# Altium PCB Front Distribution Board.PcbDoc
Units mm, origin at the board's own origin, x right, y up, seen from the top; angles counter-clockwise.
Board outline 44 x 56 mm, 2 copper layers (Top Layer, Bottom Layer), stack 1.621 mm thick; 31 components, 7 nets, 85 pads, 37 vias.
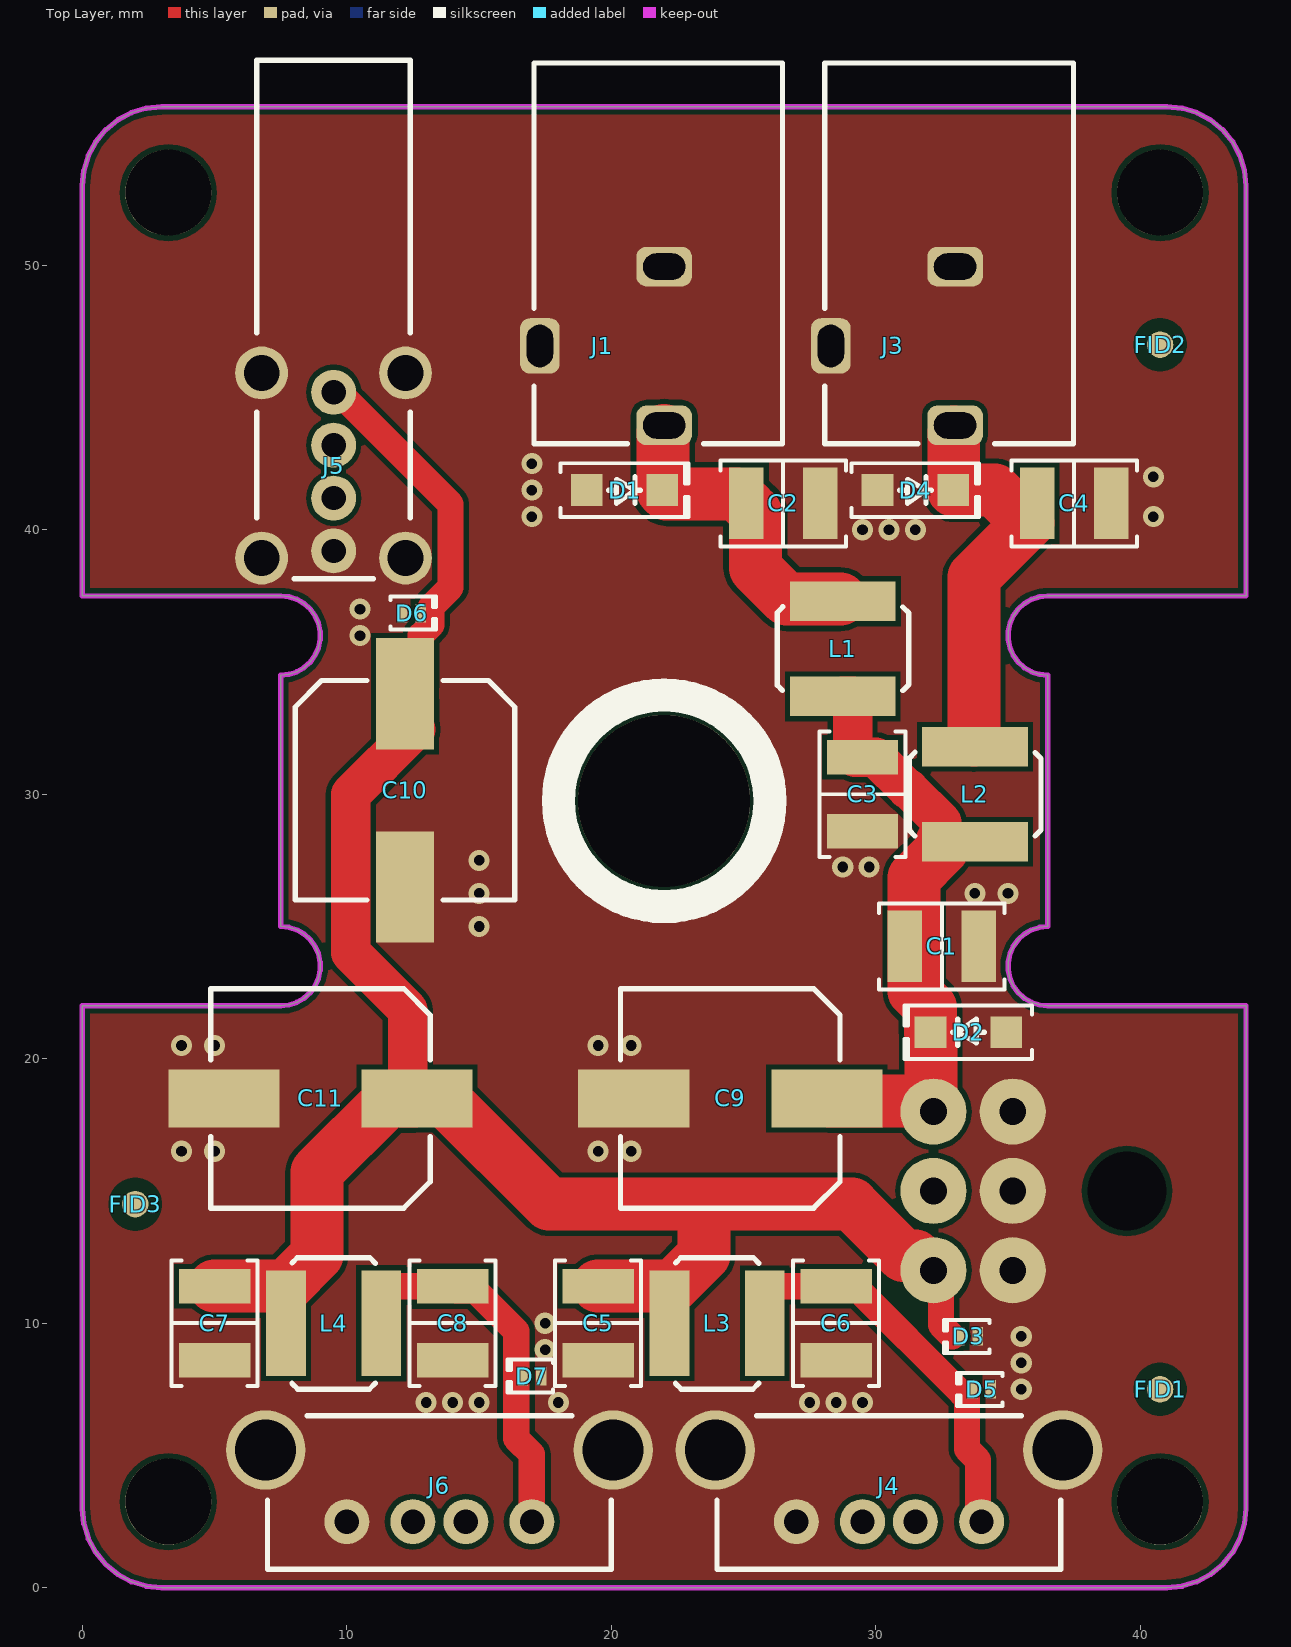
[diagram p0: Top Layer view]
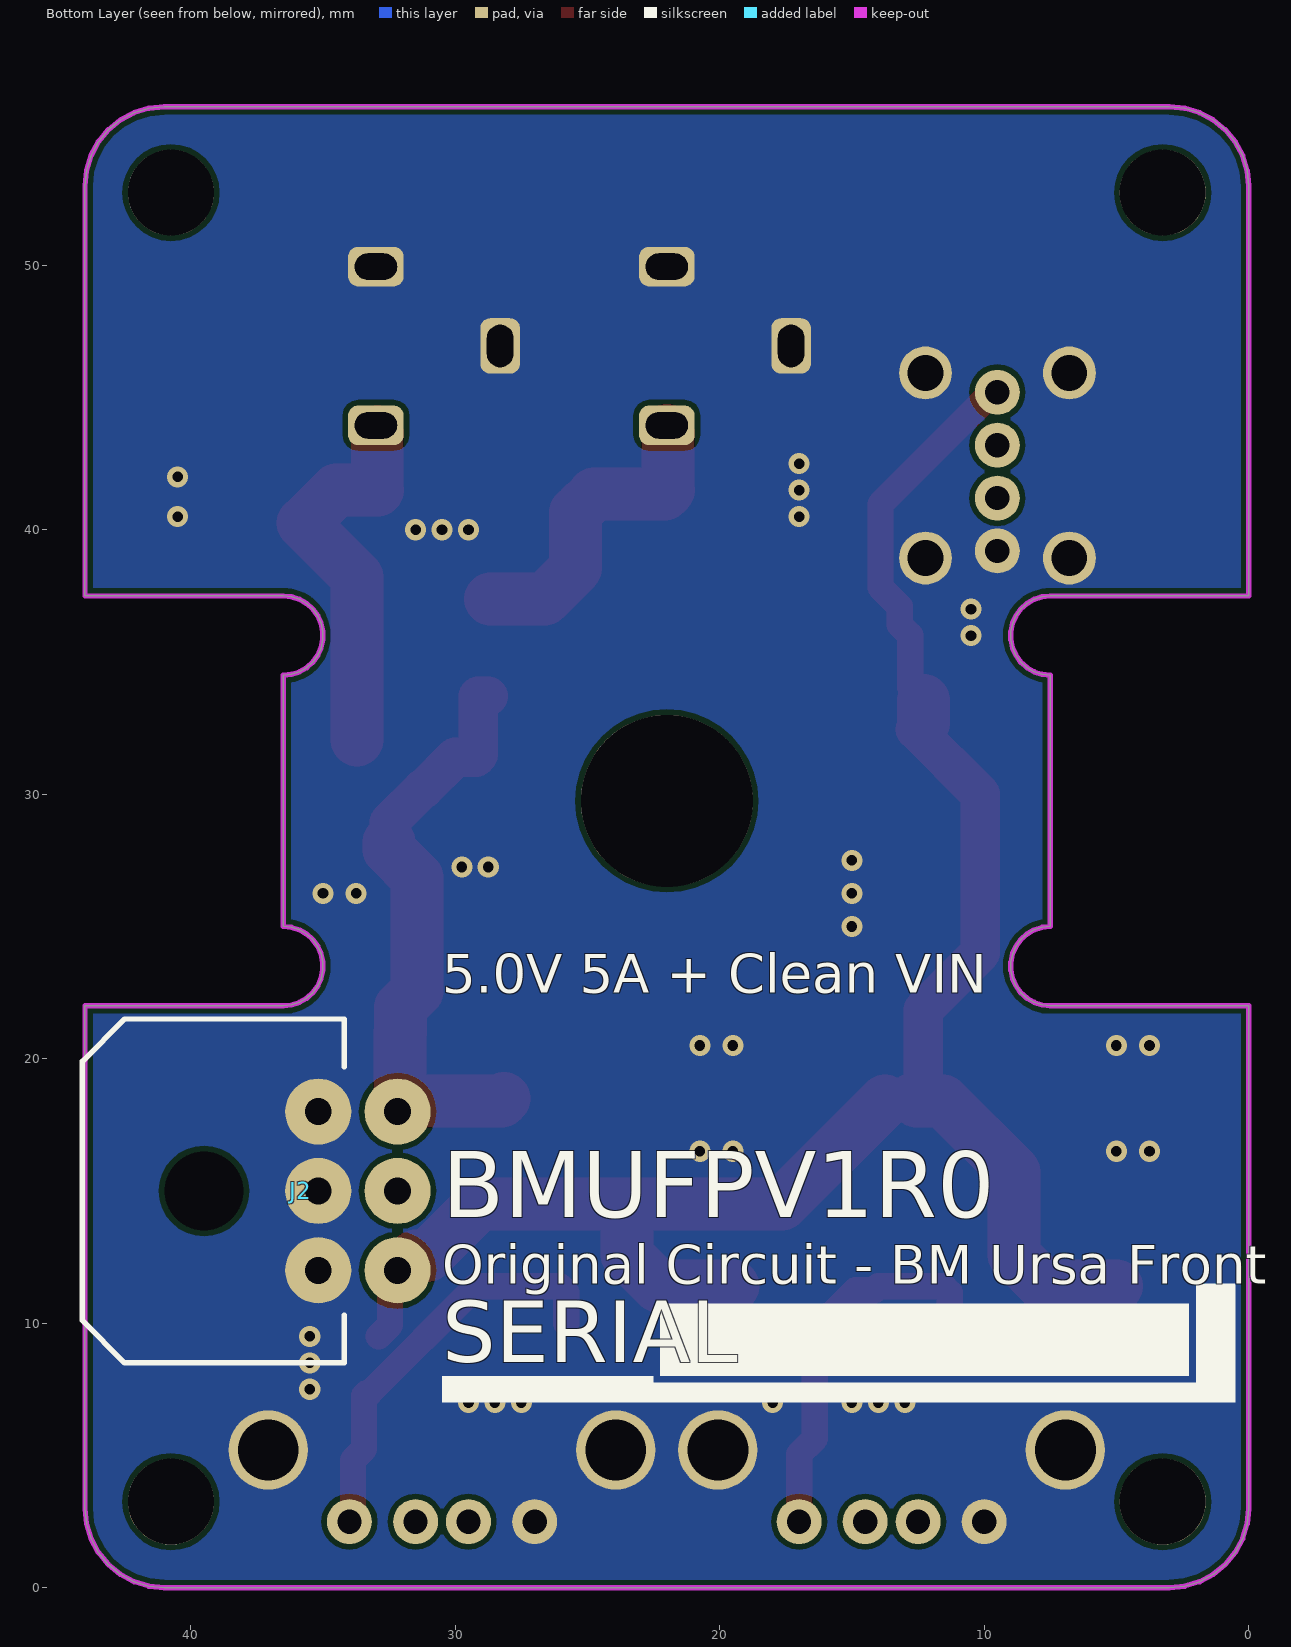
[diagram p1: Bottom Layer view, seen from below]
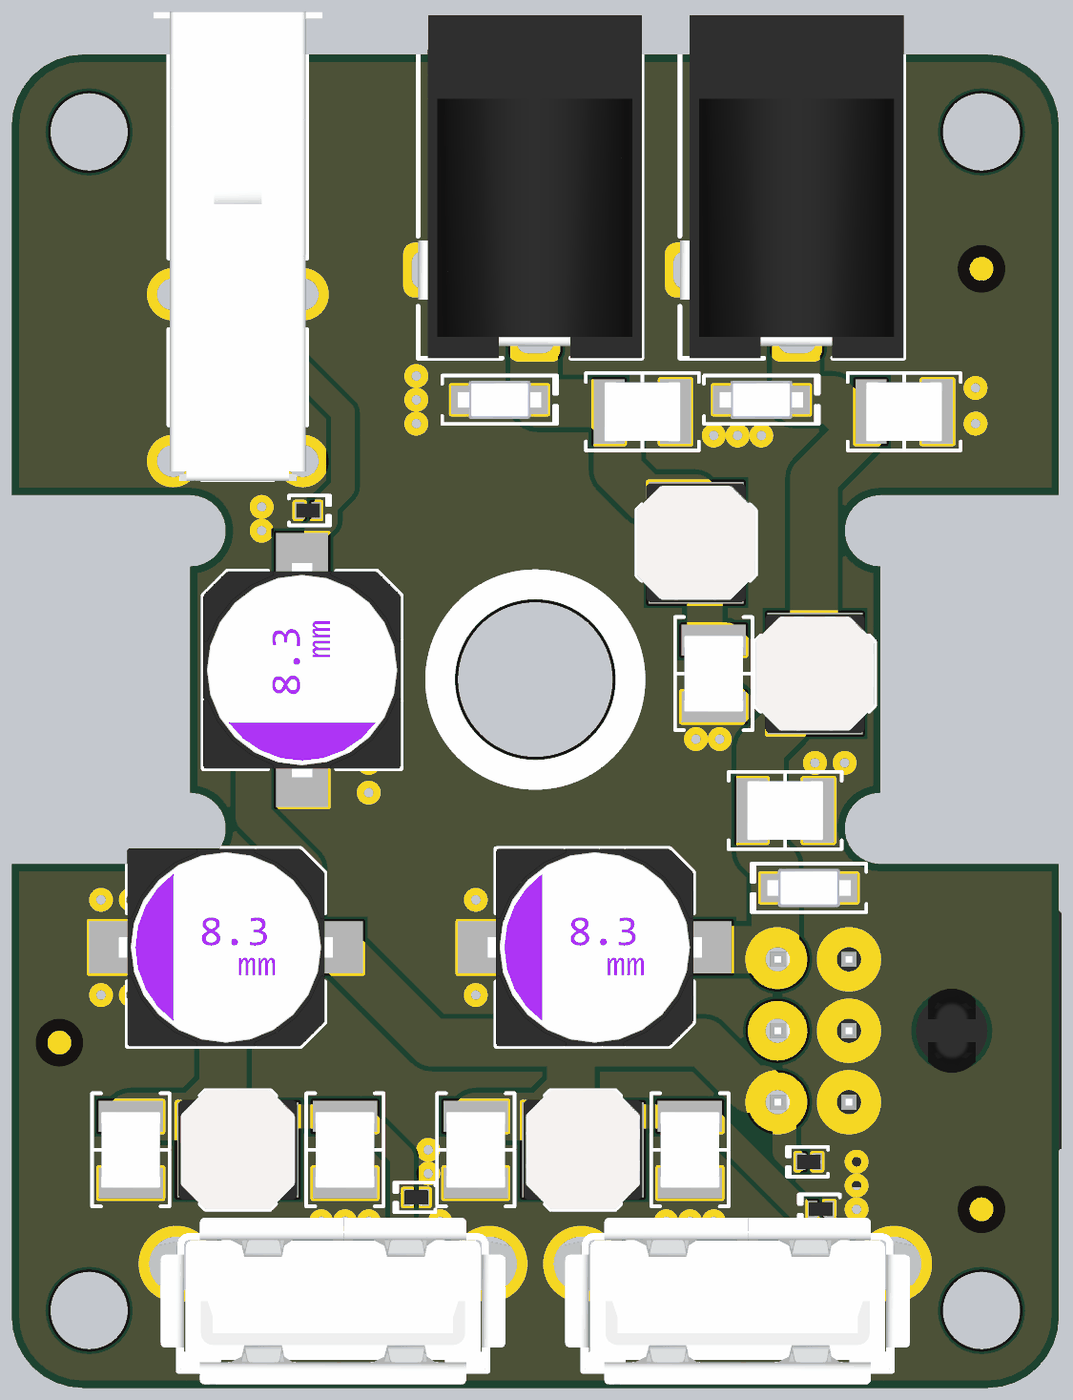
[diagram p2: 3D render of the assembled board from above, using the file's embedded part models]

## Layer stack, top to bottom
Top Solder: solder mask 0.0102, Solder Resist, Dk 3.5
Top Layer: signal copper 0.0356
Dielectric1: core 1.55, FR-4, Dk 4.8
Bottom Layer: signal copper 0.0356
Bottom Solder: solder mask 0.0102, Solder Resist, Dk 3.5

## Board outline
0.879,0.879 1.333,0.506 1.852,0.228 2.415,0.058 3,0 41,0 41.585,0.058 42.148,0.228 42.667,0.506 43.121,0.879 43.494,1.333 43.772,1.852 43.942,2.415 44,3 44,22 36.5,22 36.188,22.033 35.89,22.13 35.618,22.286 35.385,22.496 35.201,22.75 35.073,23.036 35.008,23.343 35.008,23.657 35.073,23.964 35.201,24.25 35.385,24.504 35.618,24.714 35.89,24.87 36.188,24.967 36.5,25 36.5,34.5 36.188,34.533 35.89,34.63 35.618,34.786 35.385,34.996 35.201,35.25 35.073,35.536 35.008,35.843 35.008,36.157 35.073,36.464 35.201,36.75 35.385,37.004 35.618,37.214 35.89,37.37 36.188,37.467 36.5,37.5 44,37.5 44,53 43.942,53.585 43.772,54.148 43.494,54.667 43.121,55.121 42.667,55.494 42.148,55.772 41.585,55.942 41,56 3,56 2.415,55.942 1.852,55.772 1.333,55.494 0.879,55.121 0.506,54.667 0.228,54.148 0.058,53.585 0,53 0,37.5 7.5,37.5 7.812,37.467 8.11,37.37 8.382,37.214 8.615,37.004 8.799,36.75 8.927,36.464 8.992,36.157 8.992,35.843 8.927,35.536 8.799,35.25 8.615,34.996 8.382,34.786 8.11,34.63 7.812,34.533 7.5,34.5 7.5,25 7.812,24.967 8.11,24.87 8.382,24.714 8.615,24.504 8.799,24.25 8.927,23.964 8.992,23.657 8.992,23.343 8.927,23.036 8.799,22.75 8.615,22.496 8.382,22.286 8.11,22.13 7.812,22.033 7.5,22 0,22 0,3 0.058,2.415 0.228,1.852 0.506,1.333

## Design rules (kind name [scope] priority, off if disabled: settings)
Clearance PadClearance [IsPad vs IsPad] p1: gap=0.2 ignorepadtopadclearanceinfootprint=FALSE except(0: Arc-Hole Track-Hole SMDPad-Hole THPad-Hole Via-Hole Fill-Hole Poly-Hole Region-Hole Text-Hole)
Clearance [All] p2: gap=0.2 ignorepadtopadclearanceinfootprint=FALSE except(0: Arc-Hole Track-Hole SMDPad-Hole THPad-Hole Via-Hole Fill-Hole Poly-Hole Region-Hole Text-Hole)
HoleSize [All] p1: absolutevalues=TRUE maxlimit=6.5 minlimit=0.4 maxpercent=80.000 minpercent=20.000
HoleToHoleClearance [All] p1: gap=0.2 allowstackedmicrovias=TRUE
MinimumSolderMaskSliver [All] p1: minsoldermaskwidth=0
PolygonConnect ViaConnect [IsVia] p1: connectstyle=Direct reliefconductorwidth=0.254 reliefentries=4 polygonreliefangle="90 Angle" airgapwidth=0.254
PolygonConnect [All] p2: connectstyle=Direct reliefconductorwidth=0.3 reliefentries=4 polygonreliefangle="90 Angle" airgapwidth=0.254
RoutingVias [All] p1: holewidth=0.6 width=1 viastyle="Through Hole" minholewidth=0.4 minwidth=0.8 maxholewidth=5 maxwidth=6
SilkToSilkClearance [All] p1: silktosilkclearance=0
SilkToSolderMaskClearance SilkscreenOverComponentPads [IsPad] p1: minsilkscreentomaskgap=0.05 clearancetoexposedcopper=TRUE
SolderMaskExpansion "Via Tenting" [IsVia] p1: expansion=-2 istentingtop=FALSE
SolderMaskExpansion [All] p2: expansion=0.102 istentingtop=FALSE
Width [All] p1: maxlimit=2 minlimit=0.2 preferedwidth=0.4
25 further rules are at their usual default settings.

## Components (designator, comment, footprint, x,y, rotation, side; value= is the part's Value field where it differs from the comment)
C1 "22µF" "CAP 1210_3225 - 2.8MM" 32.5,24.25 r180 top
C2 "22µF" "CAP 1210_3225 - 2.8MM" 26.5,41 r180 top
C3 "22µF" "CAP 1210_3225 - 2.8MM" 29.5,30 r90 top
C4 "22µF" "CAP 1210_3225 - 2.8MM" 37.5,41 r180 top
C5 "22µF" "CAP 1210_3225 - 2.8MM" 19.5,10 r90 top
C6 "22µF" "CAP 1210_3225 - 2.8MM" 28.5,10 r90 top
C7 "22µF" "CAP 1210_3225 - 2.8MM" 5,10 r90 top
C8 "22µF" "CAP 1210_3225 - 2.8MM" 14,10 r90 top
C9 "180µF" "CAP ALSMD POLY 8.3MM H7.0MM" 24.5,18.5 r180 top
C10 "820µF" "CAP ALSMD POLY 8.3MM H10.0MM" 12.2,30.15 r270 top
C11 "820µF" "CAP ALSMD POLY 8.3MM H10.0MM" 9,18.5 r180 top
D1 "SMF18A-TP" SOD123F 20.5,41.5 r0 top
D2 "SMF18A-TP" SOD123F 33.5,21 r180 top
D3 "TPD1E10B06QDPYRQ1" 0402 33.5,9.5 r180 top
D4 "SMF18A-TP" SOD123F 31.5,41.5 r0 top
D5 "TPD1E10B06QDPYRQ1" 0402 34,7.5 r180 top
D6 "TPD1E10B06QDPYRQ1" 0402 12.45,36.85 r0 top
D7 "TPD1E10B06QDPYRQ1" 0402 17,8 r180 top
FID1 "Fiducial" Fiducial-1mm 40.75,7.5 r90 top
FID2 "Fiducial" Fiducial-1mm 40.75,47 r90 top
FID3 "Fiducial" Fiducial-1mm 2,14.5 r90 top
J1 "PJ-102AH" "CUI PJ-102AH" 22,50.45 r0 top
J2 "0430450600" "MOLEX MICRO-FIT 3.0 0430450600" 39.5,15 r270 bottom
J3 "PJ-102AH" "CUI PJ-102AH" 33,50.45 r0 top
J4 "1002-021-01000" "CNC TECH 1002-021-01000" 30.5,4 r180 top
J5 "73725-0110BLF" "AMPHENOL USB 73725-0110BLF" 9.5,47.95 r180 top
J6 "1002-021-01000" "CNC TECH 1002-021-01000" 13.5,4 r180 top
L1 "4.7µH" "TAIYO YUDEN NRS5030" 28.75,35.5 r90 top
L2 "4.7µH" "TAIYO YUDEN NRS5030" 33.75,30 r90 top
L3 "4.7µH" "TAIYO YUDEN NRS5030" 24,10 r0 top
L4 "4.7µH" "TAIYO YUDEN NRS5030" 9.5,10 r0 top

## Footprints (in the part's own frame and the unit in brackets; to place one, negate y for a bottom-side part, rotate by r counter-clockwise, add the part's x,y. Pads: shape width x height; smd on the part's side, far side on the other; paste and mask are expansions set on the pad)
0402 [mm] "SODFL, 2-Leads, Body 0.675x1.075mm, IPC Medium Density"
  rect 0.4x0.7 smd: 1(-0.35,0) 2(0.35,0)
  silkscreen extent -0.8,-0.63 0.92,0.63, body extent -0.51,-0.31 0.5,0.3, height 0.45
"AMPHENOL USB 73725-0110BLF" [mm] "USB2.0 TYPEA 4 Pin Pitch 2mm"
  round 1.7 hole 0.92: 1(0,2.75) 2(0,4.75) 3(0,6.75) 4(0,8.75)
  round 2 hole 1.35: S(-2.72,9.02) S(-2.72,2.02) S(2.72,9.02) S(2.72,2.02)
  silkscreen extent -2.9,-9.8 2.9,9.8, body extent -3.56,-9.85 3.56,9.85, height 14.53
"CAP 1210_3225 - 2.8MM" [mm] "Chip Capacitor, 2-Leads, Body 3.20x2.50mm, IPC Medium Density"
  rect 1.3x2.7 smd: 1(-1.4,0) 2(1.4,0)
  silkscreen extent -2.37,-1.63 2.37,1.63, body extent -1.6,-1.25 1.6,1.25, height 2.8
"CAP ALSMD POLY 8.3MM H7.0MM" [mm] "Aluminum Electrolytic Capacitor, Body 8.30x8.30x7mm"
  rect 4.2x2.2 smd: 1(-3.65,0) 2(3.65,0)
  silkscreen extent -4.15,-4.15 4.15,4.15, body extent -4.5,-4.15 4.5,4.15, height 7
"CAP ALSMD POLY 8.3MM H10.0MM" [mm] "Aluminum Electrolytic Capacitor, Body 8.30x8.30x10.0mm"
  rect 4.2x2.2 smd: 1(-3.65,0) 2(3.65,0)
  silkscreen extent -4.15,-4.15 4.15,4.15, body extent -4.5,-4.15 4.5,4.15, height 10
"CNC TECH 1002-021-01000" [mm] "USB2.0 TYPEA 4 Pin Pitch 2-2.5mm"
  round 1.7 hole 0.92: 1(-3.5,1.505) 2(-1,1.505) 3(1,1.505) 4(3.5,1.505)
  round 3 hole 2.3: S(-6.57,-1.205) S(6.57,-1.205)
  silkscreen extent -6.5,-2.5 6.5,3.3, body extent -7.89,-3.14 7.89,3.86, height 15
"CUI PJ-102AH" [mm] "DC Barrel Jack W/ Switch 2.0x5.5"
  rrect50% 2.1x1.5 hole 1 slot 1.6 at 0 deg: 1(0,-6.5) 2(0,-0.5)
  rrect50% 1.5x2.1 hole 1 slot 1.6 at 90 deg: 3(-4.7,-3.5)
  silkscreen extent -4.92,-7.2 4.47,7.2, body extent -4.92,-7.2 4.47,7.2, height 11
Fiducial-1mm [mm]
  round 1 smd paste-1 mask+0.5: F(0,0)
  Top Layer pour cut-out: 0,0
  Top Layer pour cut-out: -1,0 -0.924,0.383 -0.707,0.707 -0.383,0.924 0,1 0,1 0.383,0.924 0.707,0.707 0.924,0.383 1,0 1,0 0.924,-0.383 0.707,-0.707 0.383,-0.924 0,-1 0,-1 -0.383,-0.924 -0.707,-0.707 -0.924,-0.383 -1,0
"MOLEX MICRO-FIT 3.0 0430450600" [mm]
  round 2.5 hole 1.02 unplated paste-5: 1(3,4.32) 2(0,4.32) 3(-3,4.32) 4(3,7.32) 5(0,7.32) 6(-3,7.32)
  oval 0.1x1 hole 3 unplated: M(0,0)
  silkscreen extent -6.5,-4.6 6.5,5.3, body extent -6.57,-4.6 6.58,7.64, height 8.77
SOD123F [mm] "SODFL, 2-Leads, Body 1.60x3.50mm, IPC Medium Density"
  rect 1.2x1.2 smd: 1(-1.43,0) 2(1.43,0)
  silkscreen extent -2.41,-1.02 2.41,1.02, body extent -1.75,-0.8 1.75,0.8, height 1.1
"TAIYO YUDEN NRS5030" [mm] "Inductor, 2-Leads,Taiyo Yuden, NRS5030T4R7MMGJV"
  rect 1.5x4 smd: 1(-1.8,0) 2(1.8,0)
  silkscreen extent -1.57,-2.5 1.59,2.47, body extent -2.5,-2.5 2.5,2.5, height 3

## Part data
C1 C2 C3 C4 C5 C6 C7 C8: library part CL32A226KAJNNNE, "CAP CER 22UF 25V X5R 1210", Device Package="1210 (3225 Metric)", Manufacturer="Samsung Electro-Mechanics", Operating Temperature="-55°C ~ 85°C", Supplier Part Number 1=1276-1101-1-ND, Temperature Coefficient=X5R, Tolerance=±10%, Voltage - Rated=25V, Applications="General Purpose", Capacitance=22µF, ComponentLink1Description=Datasheet, ComponentLink1URL=http://www.samsungsem.com/kr/support/product-search/mlcc/CL32A226KAJNNNE.jsp, ComponentLink2Description="DigiKey Link", ComponentLink2URL=http://digikey.com/product-detail/en/samsung-electro-mechanics/CL32A226KAJNNNE/1276-1101-1-ND/3889187, LastUpdated="21/01/2020 00:30:21", Lifecycle Status=Active, Minimum Order=1, Mounting Type="Surface Mount, MLCC", Package / Case="1210 (3225 Metric)", Packaging=TapeAndReel, Part Number=CL32A226KAJNNNE, Part Status=Active, PartId=24102, Price=0.13, Series=CL, Size / Dimension="0.126\" L x 0.098\" W (3.20mm x 2.50mm)", Supplier 1=DigiKey, Thickness (Max)="0.106\" (2.70mm)"
C9: library part APXG200ARA181MH70G, "CAP ALUM POLY 180UF 20% 20V SMD", Device Package="Radial, Can - SMD", ESR (Equivalent Series Resistance)=25mOhm, Lifetime @ Temp.="15000 Hrs @ 105°C", Manufacturer="United Chemi-Con", Operating Temperature="-55°C ~ 105°C", Ripple Current @ High Frequency="3.2A @ 100kHz", Supplier Part Number 1=565-4296-1-ND, Tolerance=±20%, Voltage - Rated=20V, Applications="General Purpose", Capacitance=180µF, ComponentLink1Description=Datasheet, ComponentLink1URL=http://www.chemi-con.co.jp/cgi-bin/CAT_DB/SEARCH/cat_db_al.cgi?e=e&j=p&pdfname=pxg, ComponentLink2Description="DigiKey Link", ComponentLink2URL=http://digikey.com/product-detail/en/united-chemi-con/APXG200ARA181MH70G/565-4296-1-ND/5824817, Height - Seated (Max)="0.276\" (7.00mm)", LastUpdated="21/01/2020 04:07:43", Lifecycle Status=Active, Minimum Order=1, Mounting Type="Surface Mount", Package / Case="Radial, Can - SMD", Packaging=TapeAndReel, Part Number=APXG200ARA181MH70G, Part Status=Active, PartId=2499, Price=0.37, Series=NPCAP™-PXG, Size / Dimension="0.315\" Dia (8.00mm)", Supplier 1=DigiKey, Surface Mount Land Size="0.327\" L x 0.327\" W (8.30mm x 8.30mm)", Type=Polymer
C10 C11: library part A765KN827M0JLAE010, "CAP ALUM POLY 820UF 20% 6.3V SMD", Device Package="Radial, Can - SMD", ESR (Equivalent Series Resistance)=10mOhm, Lifetime @ Temp.="2000 Hrs @ 105°C", Manufacturer=KEMET, Operating Temperature="-55°C ~ 105°C", Ripple Current @ High Frequency="3.35A @ 100kHz", Ripple Current @ Low Frequency="167.5mA @ 120Hz", Supplier Part Number 1=399-13684-1-ND, Tolerance=±20%, Voltage - Rated=6.3V, Applications="General Purpose", Capacitance=820µF, ComponentLink1Description=Datasheet, ComponentLink1URL=https://api.kemet.com/component-edge/download/datasheet/A765KN827M0JLAE010.pdf, ComponentLink2Description="DigiKey Link", ComponentLink2URL=http://digikey.com/product-detail/en/kemet/A765KN827M0JLAE010/399-13684-1-ND/6196370, Height - Seated (Max)="0.394\" (10.00mm)", LastUpdated="21/01/2020 04:08:13", Lifecycle Status=Active, Minimum Order=1, Mounting Type="Surface Mount", Package / Case="Radial, Can - SMD", Packaging=TapeAndReel, Part Number=A765KN827M0JLAE010, Part Status=Active, PartId=2604, Price=0.33, Series=A765, Size / Dimension="0.315\" Dia (8.00mm)", Supplier 1=DigiKey, Surface Mount Land Size="0.327\" L x 0.327\" W (8.30mm x 8.30mm)", Type=Polymer
D1 D2 D4: "TVS DIODE 18V 29.2V SOD123FL", Current - Peak Pulse (10/1000µs)=6.8A, Device Package=SOD-123F, Manufacturer="Micro Commercial Co", Operating Temperature="-65°C ~ 175°C (TA)", Power - Peak Pulse=200W, Power Line Protection=No, Supplier Device Package=SOD-123FL, Supplier Part Number 1=SMF18A-TPMSCT-ND, Voltage - Breakdown (Min)=20V, Voltage - Clamping (Max) @ Ipp=29.2V, Voltage - Reverse Standoff (Typ)=18V, Applications="General Purpose", ComponentLink1Description=Datasheet, ComponentLink1URL=https://www.mccsemi.com/pdf/Products/SMF5.0-170(SOD-123FL)-V2.pdf, ComponentLink2Description="DigiKey Link", ComponentLink2URL=http://digikey.com/product-detail/en/micro-commercial-co/SMF18A-TP/SMF18A-TPMSCT-ND/5114017, LastUpdated="21/03/2020 01:50:28", Lifecycle Status=Active, Minimum Order=1, Mounting Type="Surface Mount", Package / Case=SOD-123F, Packaging=TapeAndReel, Part Number=SMF18A-TP, Part Status=Active, PartId=10171, Price=0.09, Series=-, Supplier 1=DigiKey, Type=Zener, Unidirectional Channels=1
D3 D5 D6 D7: "TVS DIODE 5.5V 14V 2X1SON", Capacitance @ Frequency="12pF @ 1MHz", Current - Peak Pulse (10/1000µs)="6A (8/20µs)", Device Package="0402 (1006 Metric)", Manufacturer="Texas Instruments", Operating Temperature="-40°C ~ 125°C (TA)", Power - Peak Pulse=90W, Power Line Protection=No, Supplier Device Package="2-X1SON (1x.60)", Supplier Part Number 1=296-TPD1E10B06QDPYRQ1CT-ND, Voltage - Breakdown (Min)=6V, Voltage - Clamping (Max) @ Ipp="14V (Typ)", Voltage - Reverse Standoff (Typ)="5.5V (Max)", Applications=Automotive, Bidirectional Channels=1, ComponentLink1Description=Datasheet, ComponentLink1URL=http://www.ti.com/general/docs/suppproductinfo.tsp?distId=10&gotoUrl=http%3A%2F%2Fwww.ti.com%2Flit%2Fgpn%2Ftpd1e10b06-q1, ComponentLink2Description="DigiKey Link", ComponentLink2URL=http://digikey.com/product-detail/en/texas-instruments/TPD1E10B06QDPYRQ1/296-TPD1E10B06QDPYRQ1CT-ND/6609868, LastUpdated="21/03/2020 02:05:15", Lifecycle Status=Active, Minimum Order=1, Mounting Type="Surface Mount", Package / Case="0402 (1006 Metric)", Packaging=TapeAndReel, Part Number=TPD1E10B06QDPYRQ1, Part Status=Active, PartId=10475, Price=0.08, Series="Automotive, AEC-Q101", Supplier 1=DigiKey, Type=Zener
J1 J3: "CONN PWR JACK 2X5.5MM SOLDER", Current Rating (Amps)=5A, Manufacturer="CUI Devices", Material Flammability Rating="UL94 V-0", Supplier Part Number 1=CP-102AH-ND, Voltage - Rated=24VDC, Actual Diameter="0.079\" (2.00mm ID), 0.256\" (6.50mm OD)", ComponentLink1Description=Datasheet, ComponentLink1URL=https://www.cuidevices.com/product/resource/digikeypdf/pj-102ah.pdf, ComponentLink2Description="DigiKey Link", ComponentLink2URL=//digikey.com/product-detail/en/cui-devices/PJ-102AH/CP-102AH-ND/408448, Connector Type=Jack, Gender=Male, Industry Recognized Mating Diameter="2.00mm ID (0.079\"), 5.50mm OD (0.217\")", Internal Switch(s)="Single Switch, Normally Closed", LastUpdated="16/12/2019 19:01:27", Lifecycle Status=0, Mating Length/Depth="0.354\" (9.00mm)", Minimum Order=1, Mounting Type="Through Hole, Right Angle", Number of Positions/Contacts="2 Conductors, 3 Contacts", Packaging=Tray, Part Number=PJ-102AH, Part Status=Active, Price=0.76, Series=-, Shielding=Unshielded, Supplier 1=DigiKey, Termination=Solder
J2: "CONN HEADER R/A 6POS 3MM", Current Rating (Amps)=8A, Insulation Color=Black, Manufacturer=Molex, Material Flammability Rating="UL94 V-0", Supplier Part Number 1=WM1815-ND, Voltage Rating=600V, ComponentLink1Description=Datasheet, ComponentLink1URL=https://www.molex.com/pdm_docs/ps/PS-43045.pdf, ComponentLink2Description="DigiKey Link", ComponentLink2URL=http://digikey.com/product-detail/en/molex/0430450600/WM1815-ND/252528, Connector Type=Header, Contact Finish - Mating=Tin, Contact Finish - Post=Tin, Contact Finish Thickness - Mating="100.0µin (2.54µm)", Contact Length - Post="0.125\" (3.18mm)", Contact Material=Brass, Contact Shape=Square, Contact Type="Male Pin", Fastening Type="Locking Ramp", Features="Board Lock", Insulation Height="0.290\" (7.37mm)", Insulation Material="Liquid Crystal Polymer (LCP), Glass Filled", LastUpdated="20/03/2020 03:58:57", Lifecycle Status=Active, Minimum Order=1, Mounting Type="Through Hole, Right Angle", Number of Positions=6, Number of Positions Loaded=All, Number of Rows=2, Packaging=Tray, Part Number=0430450600, Part Status=Active, PartId=133, Pitch - Mating="0.118\" (3.00mm)", Price=1.80, Row Spacing - Mating="0.118\" (3.00mm)", Series="Micro-Fit 3.0 43045", Shrouding="Shrouded - 4 Wall", Style="Board to Cable/Wire", Supplier 1=DigiKey, Termination=Solder
J4 J6: "CONN RCPT USB2.0 TYPEA 4POS VERT", Current Rating (Amps)=1.5A, Manufacturer="CNC Tech", Operating Temperature="-55°C ~ 85°C", Supplier Part Number 1=1175-1265-ND, Voltage - Rated=30V, ComponentLink1Description=Datasheet, ComponentLink1URL=http://www.cnctech.us/pdfs/1002-021-01000.pdf, ComponentLink2Description="DigiKey Link", ComponentLink2URL=http://digikey.com/product-detail/en/cnc-tech/1002-021-01000/1175-1265-ND/3466946, Connector Type="USB - A", Features="Board Lock", Gender=Receptacle, LastUpdated="30/04/2020 12:00:08", Lifecycle Status=Active, Mating Cycles=1500, Minimum Order=1, Mounting Feature=Vertical, Mounting Type="Through Hole", Number of Contacts=4, Number of Ports=1, Packaging=Tray, Part Number=1002-021-01000, Part Status=Active, Price=1.02, Series=-, Specifications="USB 2.0", Supplier 1=DigiKey, Termination=Solder
J5: "CONN RCPT USB2.0 TYPEA 4POS R/A", Current Rating (Amps)=2.5A, Manufacturer="Amphenol ICC (FCI)", Operating Temperature="-55°C ~ 85°C", Supplier Part Number 1=609-1041-ND, ComponentLink1Description=Datasheet, ComponentLink1URL=http://www.amphenol-icc.com/media/wysiwyg/files/drawing/73725.pdf, ComponentLink2Description="DigiKey Link", ComponentLink2URL=http://digikey.com/product-detail/en/amphenol-icc-fci/73725-0110BLF/609-1041-ND/1001355, Connector Type="USB - A", Features="Board Lock", Gender=Receptacle, LastUpdated="30/04/2020 11:56:05", Lifecycle Status=Active, Mating Cycles=1500, Minimum Order=1, Mounting Feature=Vertical, Mounting Type="Through Hole, Right Angle", Number of Contacts=4, Number of Ports=1, Packaging=Tube, Part Number=73725-0110BLF, Part Status=Active, Price=0.91, Series=73725, Shielding=Shielded, Specifications="USB 2.0", Supplier 1=DigiKey, Termination=Solder
L1 L2 L3 L4: library part NRS5030T4R7MMGJ, "FIXED IND 4.7UH 2.6A 35 MOHM SMD", Current - Saturation=3.1A, Current Rating (Amps)=2.6A, DC Resistance (DCR)=35mOhm, Device Package=Nonstandard, Frequency - Self Resonant=31MHz, Inductance Frequency - Test=100kHz, Manufacturer="Taiyo Yuden", Operating Temperature="-25°C ~ 120°C", Supplier Part Number 1=587-3461-1-ND, Tolerance=±20%, ComponentLink1Description=Datasheet, ComponentLink1URL=https://www.yuden.co.jp/productdata/catalog/wound04_e.pdf, ComponentLink2Description="DigiKey Link", ComponentLink2URL=http://digikey.com/product-detail/en/taiyo-yuden/NRS5030T4R7MMGJ/587-3461-1-ND/4157801, Height - Seated (Max)="0.122\" (3.10mm)", Inductance=4.7µH, LastUpdated="30/03/2020 12:35:40", Lifecycle Status=Active, Material - Core=Ferrite, Minimum Order=1, Mounting Type="Surface Mount", Package / Case=Nonstandard, Packaging=TapeAndReel, Part Number=NRS5030T4R7MMGJ, Part Status=Active, PartId=3401, Price=0.17, Series="NR, S Type", Shielding=Shielded, Size / Dimension="0.193\" L x 0.193\" W (4.90mm x 4.90mm)", Supplier 1=DigiKey, Type=Wirewound

## Free pads (board coordinates)
  round 3.25 hole 3.25 unplated: 1(3.25,3.25) 1(3.25,52.75) 1(40.75,3.25) 1(40.75,52.75)
  round 6.5 hole 6.5 unplated: 1(22,29.75)

## Via types
v1: diameter 0.8, hole 0.4, Top Layer to Bottom Layer, 37 vias

## Nets (pads, with @x,y where several pads share a name; then routed paths per layer and width w, separated by ;. In a path a pad name is that pad's centre, name@x,y a point inside that pad or via, vN(x,y) a via of type N, cw(c..) or ccw(c..) an arc to the next point about the centre after c; other vN are vias at no path point)
5V: C5.2 C7.2 C10.1 C11.1 D3.2 D6.2 J2.4 J5.1 L3.1 L4.1 | length 73
  Top Layer w1: J5.1 9.689,45.2 10.139,44.75 10.142,44.75 13.92,40.972 13.92,37.82 13.2,37.1 13.2,36.41 12.8,36.01 12.8,34.05 C10.1@12.3,33.55 ; J2.4@32.467,11.463 32.467,9.933 32.9,9.5
  Top Layer w1.5: C11.1@12.056,18.6 12.306,18.85 12.306,21.85 10.15,24.006 10.15,30 C10.1@12.6,32.45
  Top Layer w2: C7.2 7.7,11.4 8.872,12.572 8.872,15.722 11.55,18.4 12.55,18.4 C11.1 ; C10.1@12.3,32.7 C10.1@12.3,33.55 ; C11.1@13.75,18.4 17.65,14.5 23.5,14.5 ; C5.2 22.328,11.4 23.5,12.572 23.5,14.5 ; J2.4 32.045,12 31.495,12.55 31.047,12.55 29.097,14.5 23.5,14.5
GND: C1.1 C2.1 C3.1 C4.1 C5.1 C6.1 C7.1 C8.1 C9.2 C10.2 C11.2 D1.1 D2.1 D3.1 D4.1 D5.1 D6.1 D7.1 J1.2 J1.3 J2.1 J2.2 J2.3 J3.2 J3.3 J4.4 J4.S J5.4 J5.S J6.4 J6.S
  other v1: 13,7 14,7 15,7 18,7 27.5,7 28.5,7 29.5,7 35.5,7.5 35.5,8.5 17.5,9 35.5,9.5 17.5,10 3.75,16.5 5,16.5 19.5,16.5 20.75,16.5 3.75,20.5 5,20.5 19.5,20.5 20.75,20.5 15,25 15,26.25 33.75,26.25 35,26.25 28.75,27.25 29.75,27.25 15,27.5 10.5,36 10.5,37 29.5,40 30.5,40 31.5,40 17,40.5 40.5,40.5 17,41.5 40.5,42 17,42.5
NetC2_2: C2.2 D1.2 J1.1 L1.2 | length 11.5
  Top Layer w2: J1.1@22,43.75 21.95,43.7 21.95,41.52 D1.2 22.08,41.35 C2.2@24.75,41.35 ; C2.2 25.45,40.65 25.45,38.55 26.622,37.378 L1.2@28.672,37.378
NetC4_2: C4.2 D4.2 J3.1 L2.2 | length 14.6
  Top Layer w2: J3.1@32.95,43.7 32.95,41.52 D4.2 34.5,41.5 35.75,40.25 33.708,38.208 L2.2@33.708,32.05
NetC6_2: C6.2 D5.2 J4.1 L3.2 | length 15.5
  Top Layer w1: L3.2 25.8,11.15 26.05,11.4 C6.2 29.2,11.4 33.25,7.35 ; 33.35,7.35 33.45,7.25 33.45,5.242 33.866,4.826 33.866,2.629 J4.1
NetC8_2: C8.2 D7.2 J6.1 L4.2 | length 14.5
  Top Layer w1: L4.2 11.3,11.15 11.55,11.4 C8.2 14.15,11.25 14.85,11.25 16.4,9.7 16.4,5.642 17,5.042 J6.1
VCC_CLEAN: C1.2 C3.2 C9.1 D2.2 J2.6 L1.1 L2.1 | length 22.9
  Top Layer w1.5: L1.1 29.125,33.7 29.125,31.5 29.225,31.4 C3.2 30,31.4 31.2,30.2 31.244,30.2 32.5,28.944 L2.1@32.5,28.2
  Top Layer w2: C9.1 28.25,18.4 31.645,18.4 32.045,18 J2.6 32.084,18.096 32.084,20.986 D2.2 32.07,21.93 31.45,22.55 31.45,26.853 32.5,27.903 L2.1@32.5,28.2
pads on no net: FID1.F FID2.F FID3.F J2.5 J2.M J4.2 J4.3 J5.2 J5.3 J6.2 J6.3

## Polygon pours and split planes (outlines as drawn)
GND on Top Layer "GND_L01_P000" (solid, remove dead copper, pour order 0): 0.879,0.879 1.333,0.506 1.852,0.228 2.415,0.058 3,0 41,0 41.585,0.058 42.148,0.228 42.667,0.506 43.121,0.879 43.494,1.333 43.772,1.852 43.942,2.415 44,3 44,22 36.5,22 36.188,22.033 35.89,22.13 35.618,22.286 35.385,22.496 35.201,22.75 35.073,23.036 35.008,23.343 35.008,23.657 35.073,23.964 35.201,24.25 35.385,24.504 35.618,24.714 35.89,24.87 36.188,24.967 36.5,25 36.5,34.5 36.188,34.533 35.89,34.63 35.618,34.786 35.385,34.996 35.201,35.25 35.073,35.536 35.008,35.843 35.008,36.157 35.073,36.464 35.201,36.75 35.385,37.004 35.618,37.214 35.89,37.37 36.188,37.467 36.5,37.5 44,37.5 44,53 43.942,53.585 43.772,54.148 43.494,54.667 43.121,55.121 42.667,55.494 42.148,55.772 41.585,55.942 41,56 3,56 2.415,55.942 1.852,55.772 1.333,55.494 0.879,55.121 0.506,54.667 0.228,54.148 0.058,53.585 0,53 0,37.5 7.5,37.5 7.812,37.467 8.11,37.37 8.382,37.214 8.615,37.004 8.799,36.75 8.927,36.464 8.992,36.157 8.992,35.843 8.927,35.536 8.799,35.25 8.615,34.996 8.382,34.786 8.11,34.63 7.812,34.533 7.5,34.5 7.5,25 7.812,24.967 8.11,24.87 8.382,24.714 8.615,24.504 8.799,24.25 8.927,23.964 8.992,23.657 8.992,23.343 8.927,23.036 8.799,22.75 8.615,22.496 8.382,22.286 8.11,22.13 7.812,22.033 7.5,22 0,22 0,3 0.058,2.415 0.228,1.852 0.506,1.333
GND on Bottom Layer "GND_L02_P001" (solid, remove dead copper, pour order 1): 0.879,0.879 1.333,0.506 1.852,0.228 2.415,0.058 3,0 41,0 41.585,0.058 42.148,0.228 42.667,0.506 43.121,0.879 43.494,1.333 43.772,1.852 43.942,2.415 44,3 44,22 36.5,22 36.188,22.033 35.89,22.13 35.618,22.286 35.385,22.496 35.201,22.75 35.073,23.036 35.008,23.343 35.008,23.657 35.073,23.964 35.201,24.25 35.385,24.504 35.618,24.714 35.89,24.87 36.188,24.967 36.5,25 36.5,34.5 36.188,34.533 35.89,34.63 35.618,34.786 35.385,34.996 35.201,35.25 35.073,35.536 35.008,35.843 35.008,36.157 35.073,36.464 35.201,36.75 35.385,37.004 35.618,37.214 35.89,37.37 36.188,37.467 36.5,37.5 44,37.5 44,53 43.942,53.585 43.772,54.148 43.494,54.667 43.121,55.121 42.667,55.494 42.148,55.772 41.585,55.942 41,56 3,56 2.415,55.942 1.852,55.772 1.333,55.494 0.879,55.121 0.506,54.667 0.228,54.148 0.058,53.585 0,53 0,37.5 7.5,37.5 7.812,37.467 8.11,37.37 8.382,37.214 8.615,37.004 8.799,36.75 8.927,36.464 8.992,36.157 8.992,35.843 8.927,35.536 8.799,35.25 8.615,34.996 8.382,34.786 8.11,34.63 7.812,34.533 7.5,34.5 7.5,25 7.812,24.967 8.11,24.87 8.382,24.714 8.615,24.504 8.799,24.25 8.927,23.964 8.992,23.657 8.992,23.343 8.927,23.036 8.799,22.75 8.615,22.496 8.382,22.286 8.11,22.13 7.812,22.033 7.5,22 0,22 0,3 0.058,2.415 0.228,1.852 0.506,1.333

## Keep-outs
Keep-Out Layer:
  the board outline again, w0.2

## Silkscreen, mask and mechanical layers (free items; w line width, h text height)
Top Overlay:
  circle w1.25: c22,29.75 r4
Bottom Overlay:
  rectangle: 22.5,7 30.5,8
  rectangle: 0.5,7 30.5,7.75
  rectangle: 0.5,7.5 2,11.5
  rectangle: 2.25,8 22.25,10.75
  text "5.0V 5A + Clean VIN" at 30.5,22 h2.5
  text "BMUFPV1R0" at 30.5,14 h2.5
  text "Original Circuit - BM Ursa Front Power" at 30.5,11 h2.5
  text "SERIAL" at 30.5,7.75 h4
Route Tool Path:
  drawing of 178 lines, arcs and shapes, not listed